# Altium PCB BTL_DLCN_2.PcbDoc
Units mm, origin at the board's own origin, x right, y up, seen from the top; angles counter-clockwise.
Board outline 30.48 x 24.77 mm, 2 copper layers (Top Layer, Bottom Layer); 14 components, 9 nets, 35 pads, 8 vias.
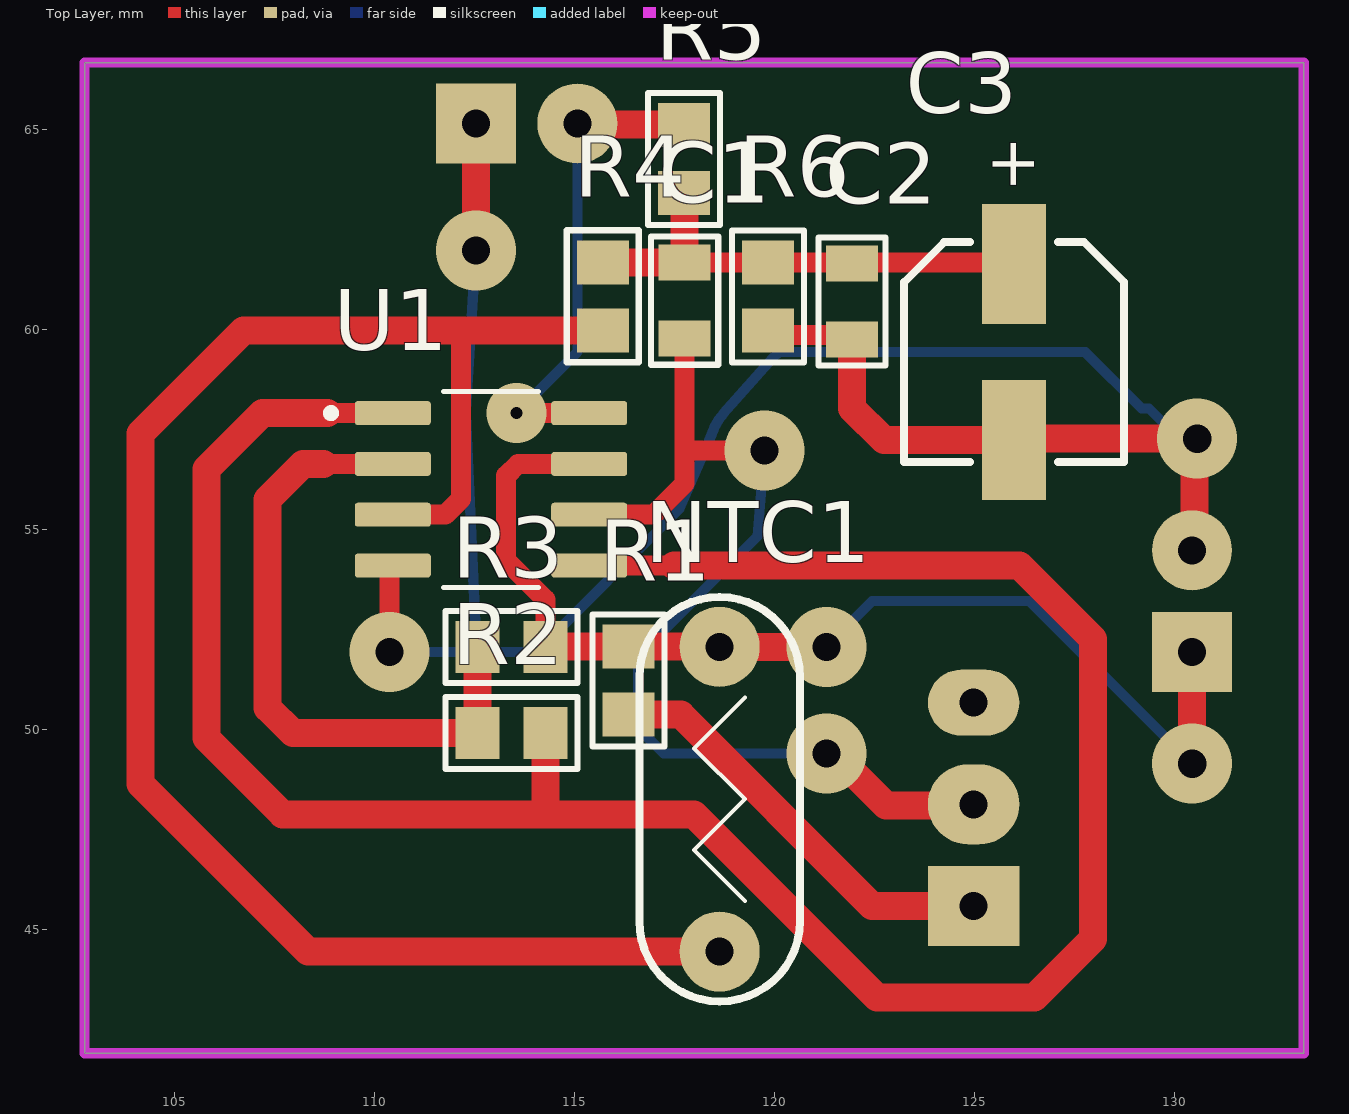
[diagram p0: Top Layer view]
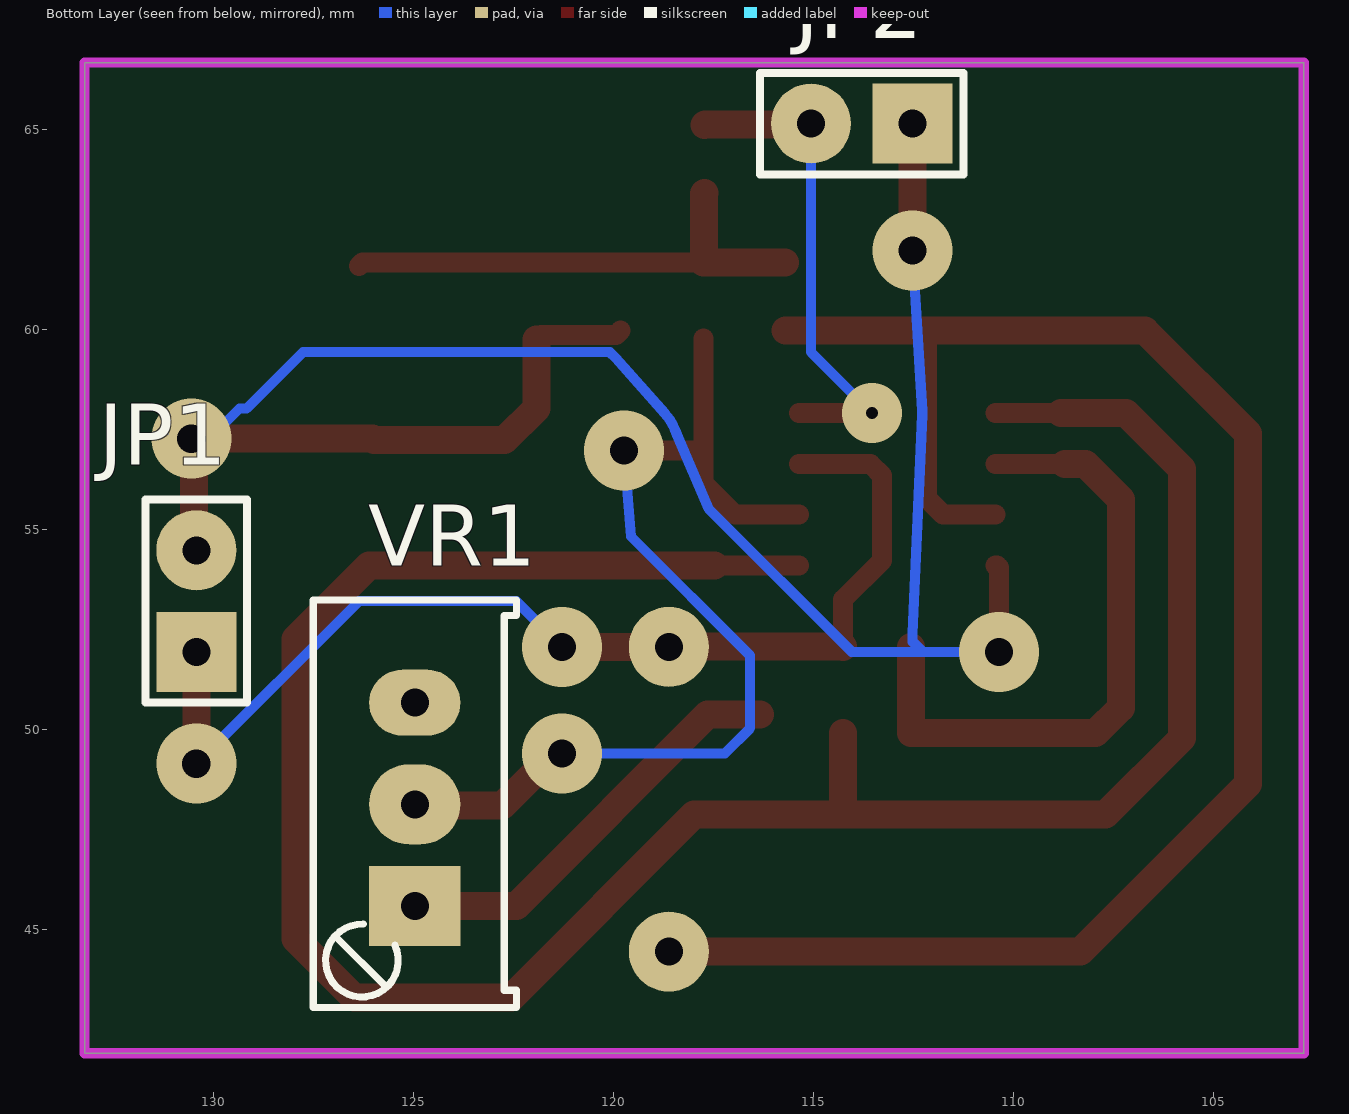
[diagram p1: Bottom Layer view, seen from below]
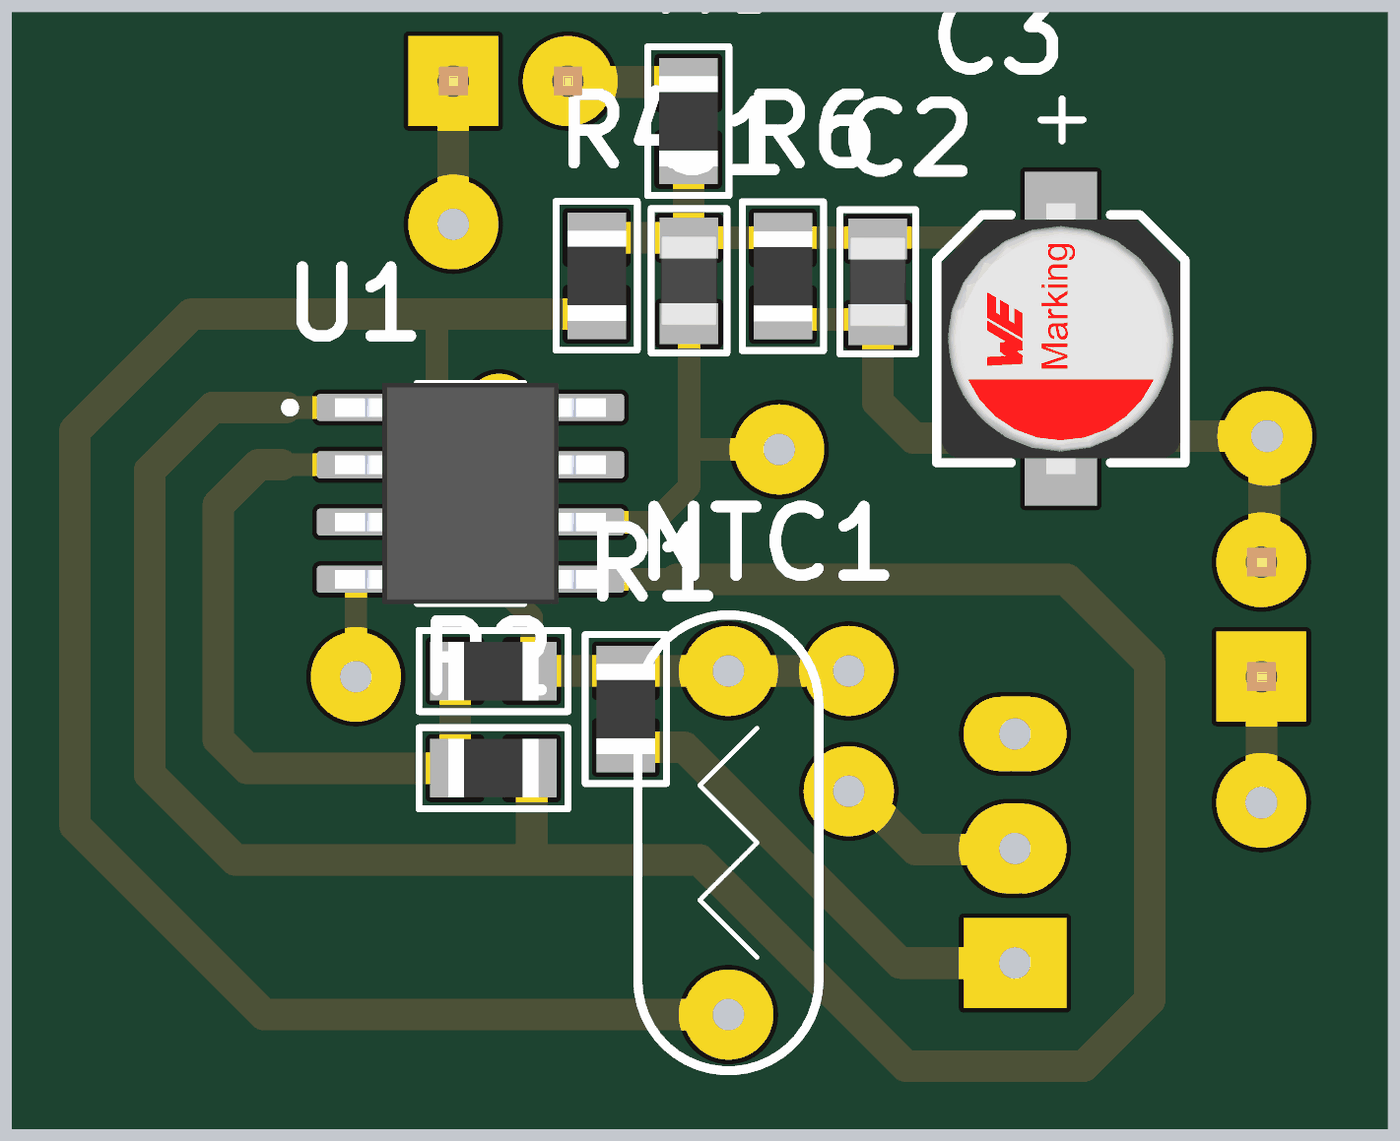
[diagram p2: 3D render of the assembled board from above, using the file's embedded part models]
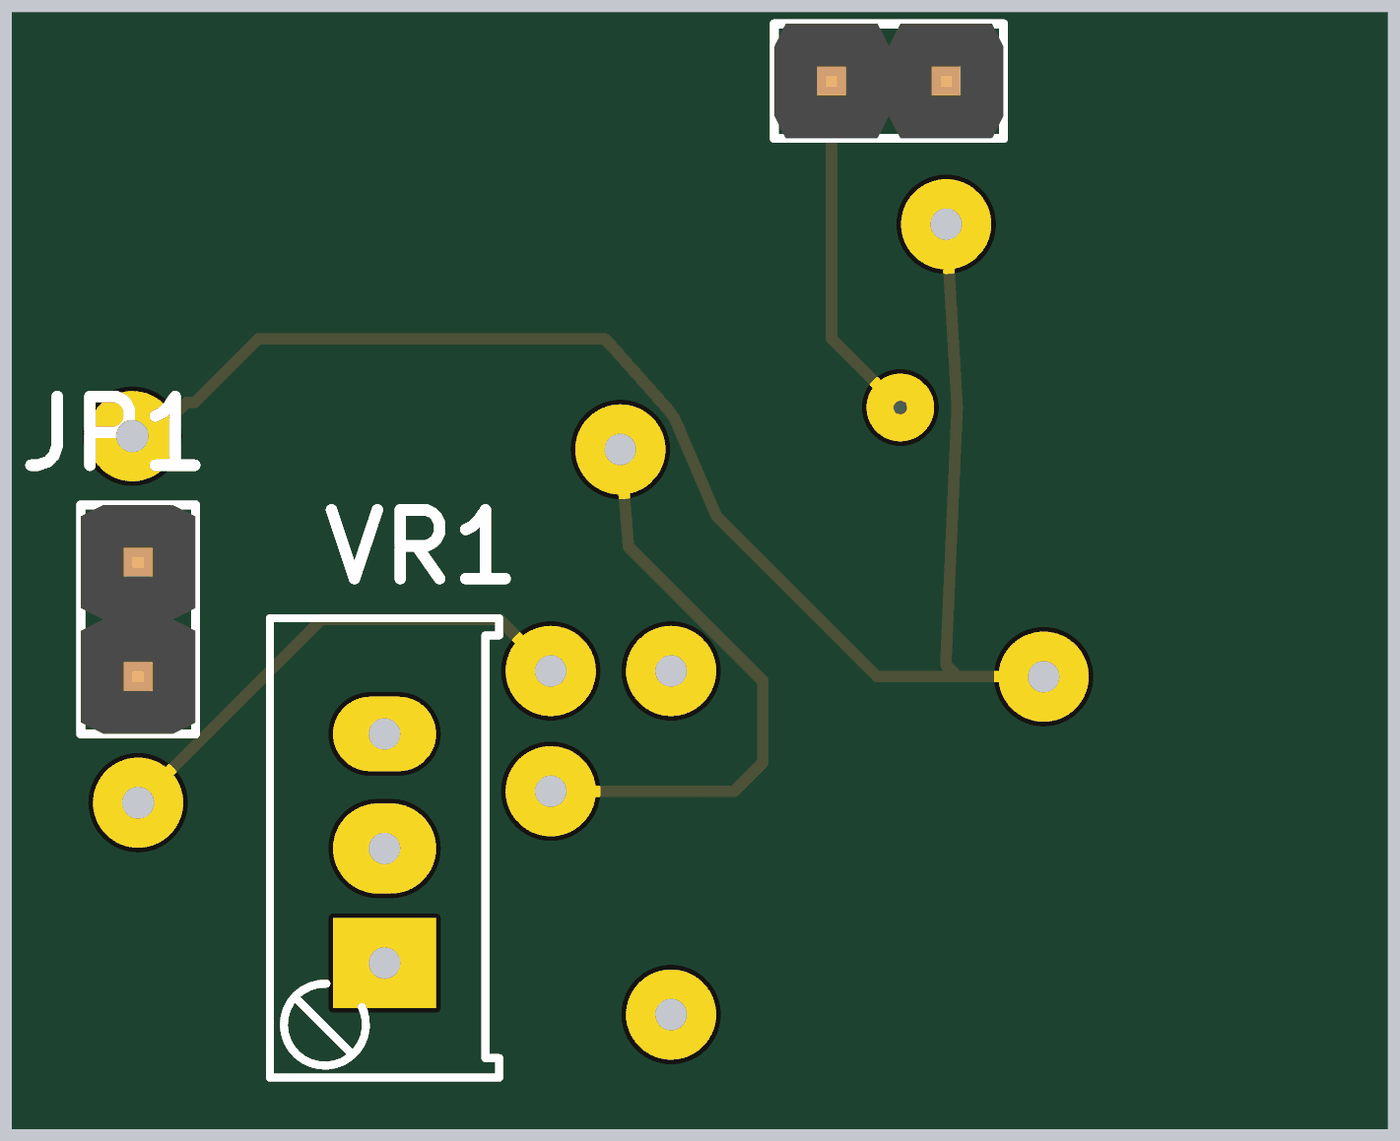
[diagram p3: 3D render of the assembled board from below, using the file's embedded part models]

## Layer stack, top to bottom
Top Solder: solder mask 0.0102, Solder Resist, Dk 3.5
Top Layer: signal copper 0.0356
Dielectric 1: dielectric 0.32, FR-4, Dk 4.8
Bottom Layer: signal copper 0.0356
Bottom Solder: solder mask 0.0102, Solder Resist, Dk 3.5

## Board outline
102.743,41.91 102.743,66.675 133.223,66.675 133.223,41.91

## Design rules (kind name [scope] priority, off if disabled: settings)
Clearance [All] p1: gap=0.254 ignorepadtopadclearanceinfootprint=FALSE
PolygonConnect [All] p1: connectstyle=Relief reliefconductorwidth=0.254 reliefentries=4 polygonreliefangle="90 Angle" airgapwidth=0.254
RoutingVias [All] p1: holewidth=0.711 width=1.27 viastyle="Through Hole" minholewidth=0.711 minwidth=1.27 maxholewidth=0.711 maxwidth=1.27
SolderMaskExpansion [All] p1: expansion=0.102 istentingtop=FALSE
SupplyNets "Schematic Supply Nets_1" [InNet('3V3')] p1: voltage=0.000
SupplyNets "Schematic Supply Nets" [InNet('GND')] p2: voltage=0.000
Width [All] p1: maxlimit=0.7 minlimit=0.254 preferedwidth=0.5 toplayer_minwidth=0.3 bottomlayer_maxwidth=0.254 bottomlayer_prefwidth=0.254 minimp=50.000000 maximp=50.000000 favimp=50.000000
30 further rules are at their usual default settings.

## Components (designator, comment, footprint, x,y, rotation, side; value= is the part's Value field where it differs from the comment)
C1 "10n" CAP_0805 117.771,60.697 r270 top value="2.7 uF, 50 VDC"
C2 "10n" CAP_0805 121.903,60.725 r90 top value="2.7 uF, 50 VDC"
C3 "10u" WCAP-ASLI_D5H5.5 125.984,59.436 r90 top value="100uF, 6.3V"
JP1 "JP2" JP2-D1T 130.429,51.943 r90 bottom
JP2 "JP2" JP2-D1T 112.522,65.151 r0 bottom
NTC1 "MF52-103" NTC10D 118.618,48.26 r90 top
R1 "68K" RESISTOR_0805 116.344,51.224 r90 top value="4.7 MOhm, 1/8W"
R2 "10K" RESISTOR_0805 113.411,49.911 r180 top value="4.7 MOhm, 1/8W"
R3 "10K" RESISTOR_0805 113.411,52.07 r0 top value="4.7 MOhm, 1/8W"
R4 "15K" RESISTOR_0805 115.697,60.833 r90 top value="4.7 MOhm, 1/8W"
R5 "10K" RESISTOR_0805 117.729,64.262 r270 top value="4.7 MOhm, 1/8W"
R6 "10K" RESISTOR_0805 119.825,60.824 r270 top value="4.7 MOhm, 1/8W"
U1 "MCP6002-I/SN" SOIC127P600X175-8N 112.903,56.007 r0 top
VR1 "50K" VR-S3 124.968,45.593 r90 bottom

## Footprints (in the part's own frame and the unit in brackets; to place one, negate y for a bottom-side part, rotate by r counter-clockwise, add the part's x,y. Pads: shape width x height; smd on the part's side, far side on the other; paste and mask are expansions set on the pad)
CAP_0805 [mm]
  rect 0.9x1.3 smd: 1(-0.975,-0.025) 2(0.925,-0.025)
  silkscreen extent -1.63,-0.86 1.57,0.81, body extent -1.03,-0.65 0.97,0.6, height 0.6
JP2-D1T [mm] "2 pins, 1 row, straight, gold plating"
  rect 2x2 hole 0.7: 1(0,0)
  round 2 hole 0.7: 2(2.54,0)
  silkscreen extent -1.27,-1.27 3.81,1.27, body extent -1.27,-1.27 3.81,1.27, height 8.54
NTC10D [mm] "Capacitor, Ceramic, ThrNTC 2A"
  round 2 hole 0.7: 1(-3.81,0) 2(3.81,0)
  silkscreen extent -5.06,-2.01 5.06,2.01
RESISTOR_0805 [mm] "Chip Resistor, 2-Leads, Body 2,00x1,20mm, IPC Medium Density"
  rect 1.1x1.3 smd: 1(-0.85,0) 2(0.85,0)
  silkscreen extent -1.65,-0.9 1.65,0.9, body extent -1,-0.65 1,0.65, height 0.45
SOIC127P600X175-8N [mm]
  rrect25% 1.9x0.6 smd: 1(-2.455,1.905) 2(-2.455,0.635) 3(-2.455,-0.635) 4(-2.455,-1.905) 5(2.455,-1.905) 6(2.455,-0.635) 7(2.455,0.635) 8(2.455,1.905)
  silkscreen extent -4.1,-2.45 1.19,2.45, body extent -3,-2.45 3,2.45, height 1.75
VR-S3 [mm] "Variable Resistor"
  rect 2x2.286 hole 0.7: 1(0,0)
  oval 2x2.286 hole 0.7: 2(2.54,0)
  oval 1.651x2.286 hole 0.7: 3(5.08,0)
  silkscreen extent -2.54,-2.54 7.65,2.54, body extent -2.31,-2.49 7.39,2.29, height 10.91
WCAP-ASLI_D5H5.5 [mm] "Aluminium Electrolytic V-Chip SMT Capacitors, 5x5.5mm"
  rect 3x1.6 smd: 1(2.2,0) 2(-2.2,0)
  silkscreen extent -2.75,-2.75 2.75,2.75, body extent -3,-2.65 3,2.65, height 5.5

## Part data
C1 C2: library part 0108052781050, "CAP, size 0805, 2.7 uF, 50 VDC", Capacitance="2.7 uF", Manufacture Name=TDK, Manufacture SN=CGA4C2C0G1H272J060AA, Operating Temperature="-55 to +125degC", Tolerance=+/-5%, Voltage Rating DC="50 VDC", ComponentLink2Description=Datasheet, ComponentLink2URL=https://product.tdk.com/system/files/dam/doc/product/capacitor/ceramic/mlcc/catalog/mlcc_automotive_general_en.pdf?ref_disty=mouser, Mounting Technology=SMT, Packaging="Tape and Reel", Size=0805, Supplier 1 Name=Mouser, Supplier 1 SN=810-CGA4C2C0G1H272J, Supplier 1 URL=https://www.mouser.vn/ProductDetail/TDK/CGA4C2C0G1H272J060AA?qs=FxQuwy19cyDK2SI%2FAkg0pQ%3D%3D&utm_source=mouser-refine-download&utm_medium=file&utm_campaign=CGA4C2C0G1H272J060AA&utm_content=TDK, Supplier 2 Name=Digi-Key, Supplier 2 SN=445-5674-2-ND, Supplier 2 URL=https://www.digikey.com/en/products/detail/tdk-corporation/cga4c2c0g1h272j060aa/2443152, Supplier 3 Name=thegioiic, Supplier 3 SN=OEM, Supplier 3 URL=N/A
C3: library part 865080142007, "V-Chip, D5 x H5.5mm, 100uF, 6.3V", Capacitance=100uF, Capacitance Tolerance=+/-20%, Leakage Current=6.3uA, Manufacturer="Wurth Elektronik", Manufacturer Part Number=N/A, Operating Temperature Max=105°C, Operating Temperature Min=-55°C, Rated Voltage (DC)=6.3V, Ripple Current=170mA, Category="Aluminum Electrolytic Capacitors", ComponentLink2Description="Datasheet Link", ComponentLink2URL=https://www.we-online.com/redexpert/spec/865080142007?ad, Diameter=5mm, Dissipation Factor=24%, Endurance=2000h, Height=5.5mm, Mount="Surface Mount", Packaging="Tape and Reel", Supplier 1 Name=Mouser, Supplier 1 SN=710-865080142007, Supplier 1 URL=https://www.mouser.vn/ProductDetail/Wurth-Elektronik/865080142007?qs=0KOYDY2FL2%2Fwso3YmuIP2w%3D%3D, Supplier 2 Name=Digi-Key, Supplier 2 SN=N/A, Supplier 2 URL=N/A, Supplier 3 Name=thegioiic, Supplier 3 SN=N/A, Supplier 3 URL=https://www.thegioiic.com/tu-nhom-smd-100uf-10v-5x5-4mm-panasonic-eee1aa101war
JP1 JP2: "WR-PHD 2.54 mm Angled Socket Header", Manufacturer="W¨¹rth Elektronik eiSos GmbH", partNo=613002143121, ComponentLink1 Description=Manufacturer, ComponentLink1URL=http://www.we-online.com, ComponentLink2 Description=Datasheet, ComponentLink2URL=http://katalog.we-online.de/em/datasheet/6130xx143121.pdf, Created by="Karrer Zheng", Created Date="29 March 2013", NoPins=02
NTC1: library part NTC10D
R1 R2 R3 R4 R5 R6: library part 0008054755, "RES, size 0805, 4.7 MOhm, 1/8W", Manufacture  Name=N/A, Rated Power="1/8 W", Resistance="4.7 MOhm", Resistance Tolerance=+/-1%, ComponentLink1Description="Datasheet link", ComponentLink1URL=N/A, ComponentLink2Description="Supplier 1 URL", ComponentLink2URL=https://www.mouser.vn/ProductDetail/YAGEO/RV0805JR-074M7L?qs=XvqVlMQ4V3WjwKR%2FSBdWbg%3D%3D, ComponentLink3Description="Supplier 2 URL", ComponentLink3URL=https://www.digikey.com/en/products/detail/yageo/RC0805JR-074M7L/728328, ComponentLink4Description="Supplier 3 URL", ComponentLink4URL=N/A, Manufacture  SN=N/A, Mounting Technology=SMT, Size=0805, Supplier 1 Name=Mouser, Supplier 1 SN=603-RV0805JR-074M7L, Supplier 1 URL=https://www.mouser.vn/ProductDetail/YAGEO/RV0805JR-074M7L?qs=XvqVlMQ4V3WjwKR%2FSBdWbg%3D%3D, Supplier 2 Name=Digi-Key, Supplier 2 SN=311-4.7MARTR-ND, Supplier 2 URL=https://www.digikey.com/en/products/detail/yageo/RC0805JR-074M7L/728328, Supplier 3 Name=Thegioiic, Supplier 3 SN=N/A, Supplier 3 URL=N/A
U1: "Microchip , Dual Op Amp, 1MHzCMOS, Rail to Rail, 3V, 5V, 8-Pin SOIC", Package="SO-8 Microchip", Check_prices=https://www.snapeda.com/parts/MCP6002-I/SN/Microchip/view-part/?ref=eda, MF=Microchip, MP=MCP6002-I/SN, SnapEDA_Link=https://www.snapeda.com/parts/MCP6002-I/SN/Microchip/view-part/?ref=snap
VR1: library part "Resistor Var", "https://www.thegioiic.com/3296w-503-bien-tro-chiet-ap-50-kohm-3-chan-chinh-top-0-5w"

## Via types
v1: diameter 2, hole 0.7, Top Layer to Bottom Layer, 5 vias
v2: diameter 2, hole 0.711, Top Layer to Bottom Layer, 2 vias
v3: diameter 1.5, hole 0.3, Top Layer to Bottom Layer, 1 vias

## Nets (pads, with @x,y where several pads share a name; then routed paths per layer and width w, separated by ;. In a path a pad name is that pad's centre, name@x,y a point inside that pad or via, vN(x,y) a via of type N, cw(c..) or ccw(c..) an arc to the next point about the centre after c; other vN are vias at no path point)
3V3: JP2.2 R5.1 U1.8 | length 12.4
  Top Layer w0.5: v3(113.538,57.912) U1.8
  Top Layer w0.7: JP2.2 115.081,65.132 117.71,65.132 R5.1
  Bottom Layer w0.254: v3(113.538,57.912) 115.062,59.436 JP2.2
GND: C2.1 C3.2 JP1.2 JP2.1 R6.2 U1.4 | length 56
  Top Layer w0.5: v1(110.363,51.943) 110.363,54.052 110.413,54.102 U1.4 ; R6.2 119.937,59.862 121.815,59.862 C2.1
  Top Layer w0.7: v1(112.522,61.976) JP2.1 ; C2.1 121.928,58.031 122.723,57.236 C3.2 126.025,57.277 v2(130.556,57.277) ; JP1.2 130.493,54.546 130.493,57.213 v2@130.515,57.236
  Bottom Layer w0.254: v1(110.363,51.943) 112.268,51.943 ; v1(112.522,61.976) 112.282,57.98 ccw(c113.411,57.912) 112.281,57.862 112.522,52.407 112.522,52.197 112.448,52.123 112.268,51.943 ; v2(130.556,57.277) 130.101,57.277 129.352,58.026 129.172,58.026 127.762,59.436 120.094,59.436 119.948,59.29 118.711,57.901 ccw(c119.743,56.982) 118.443,57.45 cw(c117.378,57.829) 118.417,57.384 117.616,55.513 114.046,51.943 112.268,51.943
NetC1_1: C1.1 C2.2 C3.1 R4.2 R5.2 R6.1 | length 12.4
  Top Layer w0.5: C1.1 117.751,61.678 119.883,61.678 119.888,61.683 122.072,61.683 126.277,61.683 C3.1@126.365,61.595
  Top Layer w0.7: R4.2@115.707,61.673 C1.1 117.737,61.681 117.737,63.404 R5.2
NetC1_2: C1.2 U1.6 VR1.2 | length 25.7
  Top Layer w0.5: U1.6 116.967,55.372 117.746,56.151 117.746,57.023 ; C1.2 117.746,57.023 ; v1(119.743,56.982) 117.786,56.982 117.746,57.023
  Top Layer w0.7: v1(121.285,49.403) 121.479,49.403 122.775,48.107 124.942,48.107 VR1.2
  Bottom Layer w0.254: v1(119.743,56.982) 119.562,54.826 116.586,51.85 116.586,50.038 117.221,49.403 v1(121.285,49.403)
NetJP1_1: JP1.1 NTC1.2 R1.2 R3.2 U1.7 | length 28
  Top Layer w0.5: R3.2 114.261,53.252 113.284,54.229 113.284,56.349 113.577,56.642 U1.7
  Top Layer w0.7: R3.2 114.263,52.072 116.342,52.072 R1.2 116.346,52.072 118.616,52.072 NTC1.2 v1(121.285,52.07) ; v2(130.429,49.149) JP1.1
  Bottom Layer w0.254: v1(121.285,52.07) 122.428,53.213 126.365,53.213 v2(130.429,49.149)
NetNTC1_1: NTC1.1 R4.1 U1.3 | length 43.7
  Top Layer w0.5: U1.3 111.76,55.372 112.157,55.769 112.157,59.983
  Top Layer w0.7: R4.1 112.157,59.983 106.719,59.983 104.14,57.404 104.14,48.641 108.331,44.45 NTC1.1
NetR1_1: R1.1 VR1.1 | length 10.6
  Top Layer w0.7: R1.1 117.647,50.374 122.428,45.593 VR1.1
NetR2_1: R2.1 U1.1 U1.5 | length 60.3
  Top Layer w0.5: 108.818,57.912 U1.1 ; U1.5 117.475,54.102
  Top Layer w0.7: 108.818,57.912 107.188,57.912 105.791,56.515 105.791,49.784 107.696,47.879 114.261,47.879 ; R2.1 114.261,47.879 ; 117.475,54.102 126.111,54.102 127.953,52.261 127.953,44.767 126.492,43.307 122.555,43.307 117.983,47.879 114.261,47.879
NetR2_2: R2.2 R3.1 U1.2 | length 16.4
  Top Layer w0.5: 108.712,56.642 U1.2
  Top Layer w0.7: 108.712,56.642 108.204,56.642 107.315,55.753 107.315,50.546 107.95,49.911 R2.2 R3.1
pads on no net: VR1.3

## Keep-outs
Keep-Out Layer:
  lines w0.254: 102.743,41.91 102.743,66.675 133.223,66.675 133.223,44.45 133.223,41.91 102.743,41.91

## Text inside footprints (layer, text, board x,y; h text height)
C3: Top Overlay "+" at 126.484,63.436 h1.22 r90